# Allegro board ex2_rlc.brd
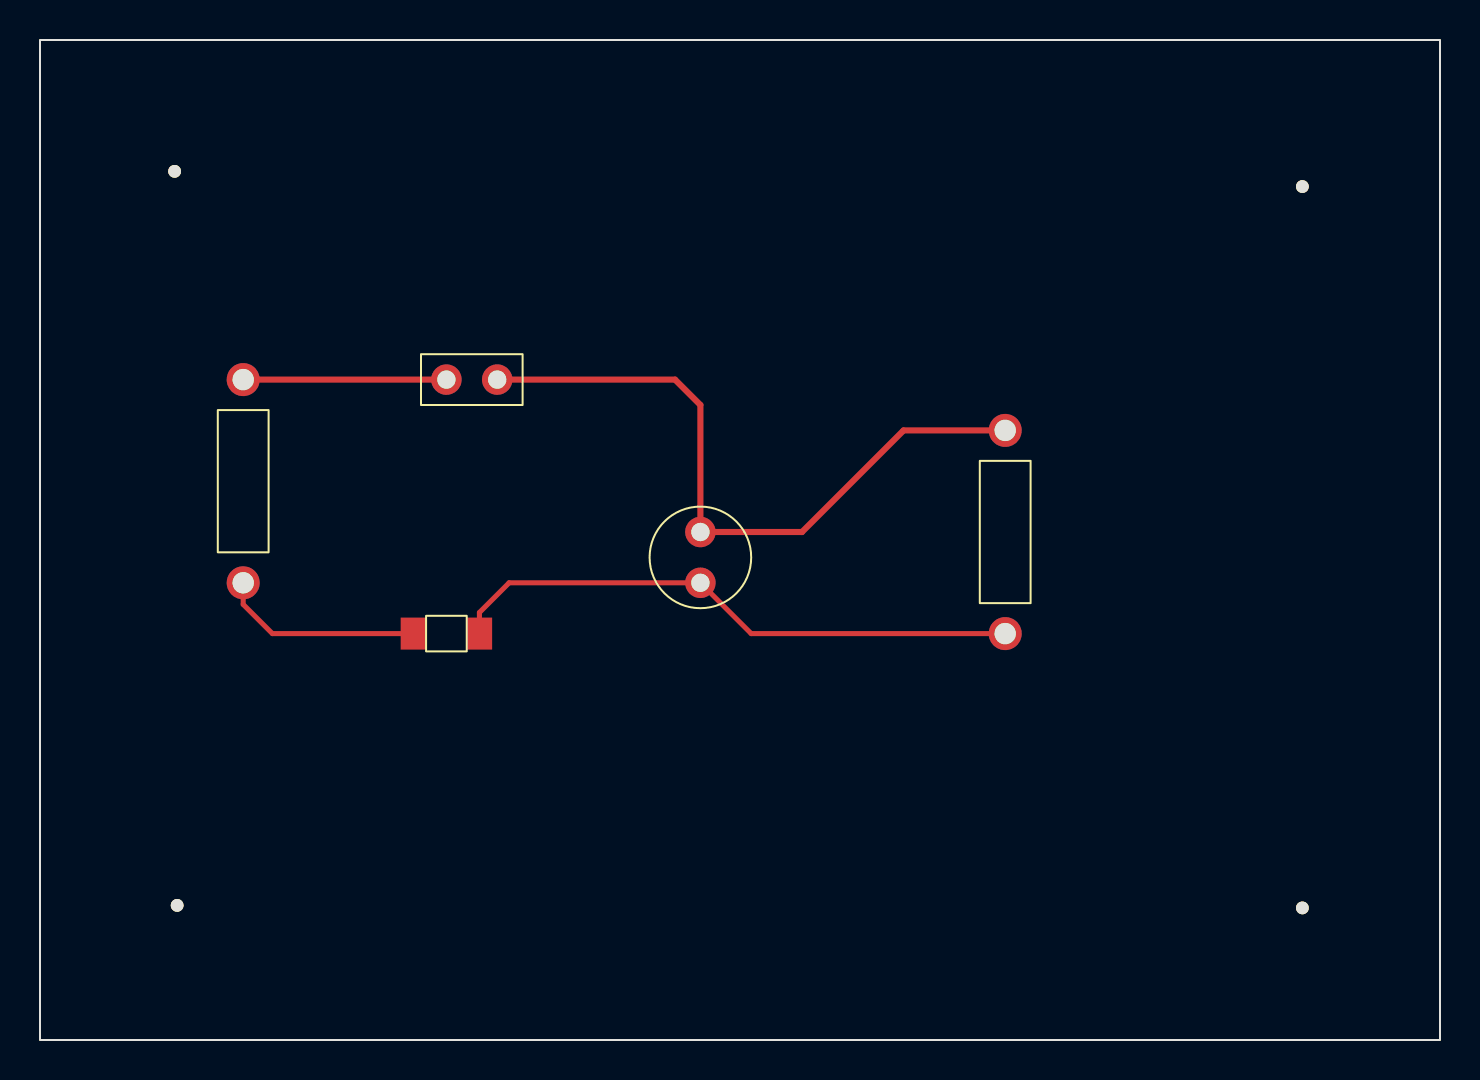
[diagram p0: board, top side]
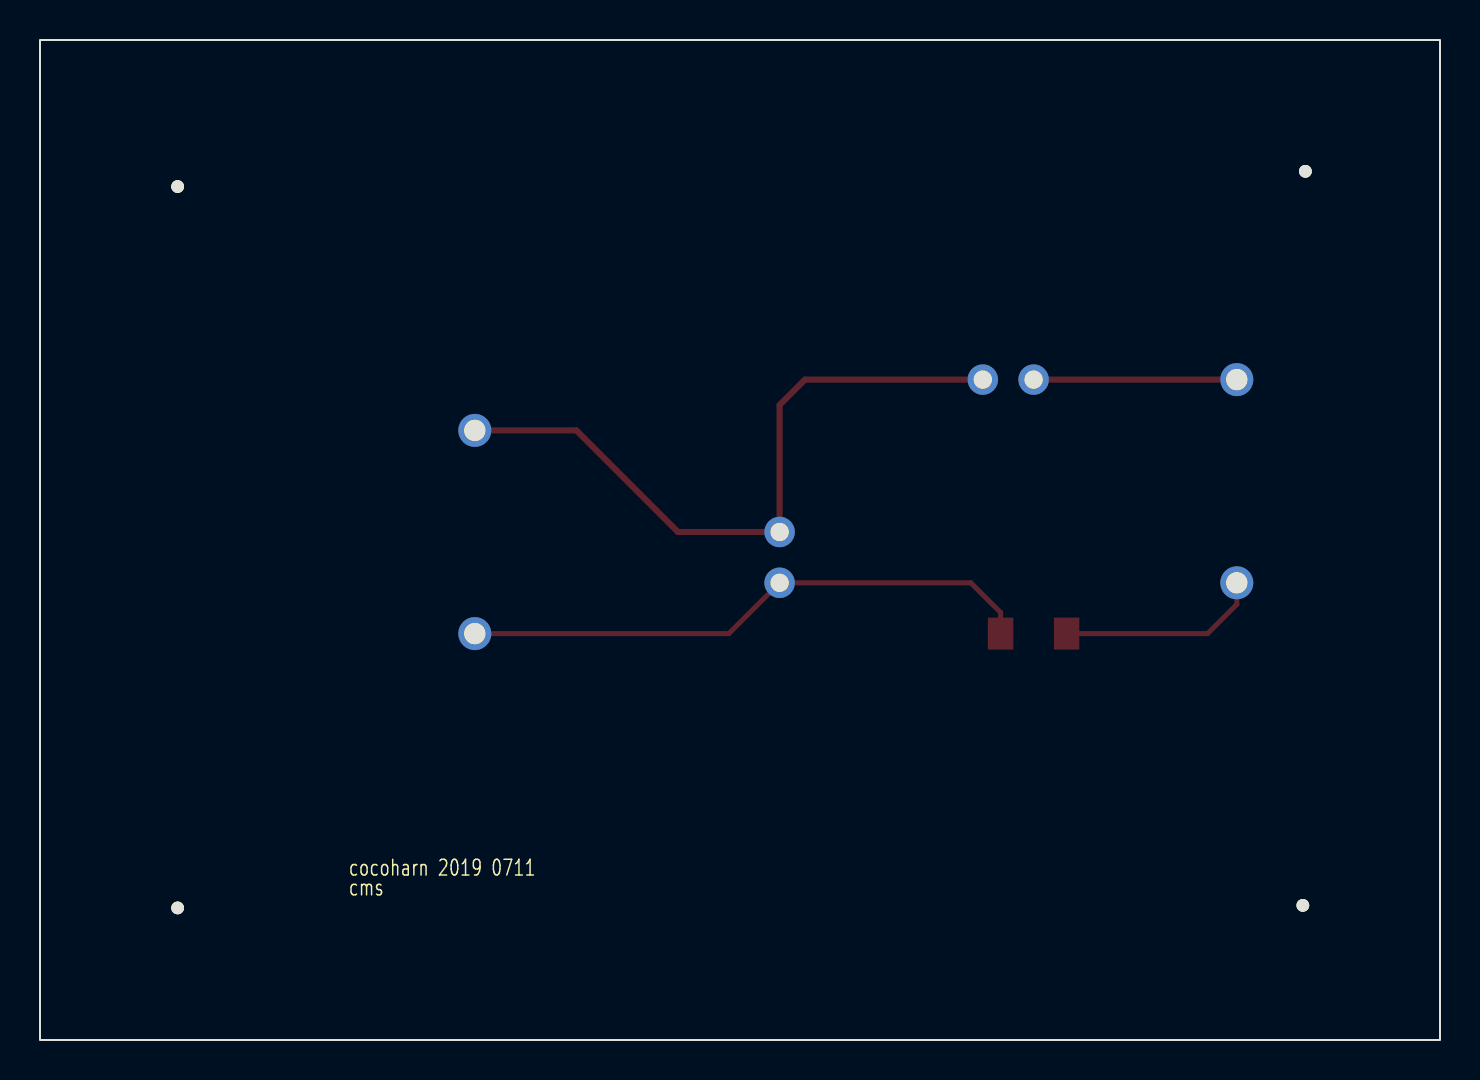
[diagram p1: board, bottom side, seen from below]

Outline 70 x 50 mm; copper layers: TOP, BOTTOM. Coordinates in mm from the lower left corner of the outline.
Outline path: rectangle 0,0 70,50

## Design rules (mm)
net group BASENETS: nets KKK N00135
net group POWERNETS: nets GND VCC

## Placement (name value [footprint] x y rotation side)
C1  1u  [CAP196]  33.02 22.86 0 top
J1  CON2  [JUMPER2]  20.32 33.02 0 top
L1  100n  [SMDRES]  20.32 20.32 0 top
NOREF  -  [unnamed]  6.86 6.73 0 top
NOREF#2  -  [unnamed]  6.73 43.43 0 top
NOREF#3  -  [unnamed]  63.12 6.6 0 top
NOREF#4  -  [unnamed]  63.12 42.67 0 top
R1  330  [RES400]  10.16 33.02 180 top
R2  330  [RES400]  48.26 20.32 0 top

## Library data of the parts
C1 = CAP NP: Tolerance: ***; User Part Number: ***
J1 = CON2: User Part Number: ***
L1 = INDUCTOR: Tolerance: ***; User Part Number: ***
R1 R2 = R: Tolerance: ***; User Part Number: ***

## Footprints (pads in the part's own frame, mm; a bottom-side part is the same pattern mirrored in y, then rotated)
CAP196
  round 1.524 hole 0.914: 1(0,0) 2(0,2.54)
JUMPER2
  round 1.524 hole 0.914: 1(0,0) 2(2.54,0)
RES400
  round 1.651 hole 1.067: 1(0,0) 2(0,10.16)
SMDRES
  rect 1.27x1.6 smd: 1(-1.651,0) 2(1.651,0)
unnamed
  round 0.635 hole 3.175 unplated: (0,0)

## Nets
GND: C1.2 J1.2 R2.2
VCC: J1.1 R1.1
KKK: L1.1 R1.2
N00135: C1.1 L1.2 R2.1

## Routing (per net, layer and track width the routed paths; a pad name or vN(x,y) marks a point on that pad's centre or on a via; arc(x,y) is an arc through that point)
GND: length 34.4
  TOP w0.308: J1.2 31.75,33.02 33.02,31.75 C1.2 38.1,25.4 43.18,30.48 R2.2
VCC: length 10.2
  TOP w0.308: R1.1 J1.1
KKK: length 10.2
  TOP w0.254: R1.2 10.16,21.78 11.62,20.32 L1.1
N00135: length 29
  TOP w0.254: R2.1 35.56,20.32 C1.1 23.46,22.86 21.97,21.37 L1.2

## Text on the board
Ref Des/Silkscreen Bottom: cocoharn 2019 0711 | cms
TOLERANCE_TOP: FIGURE | FINISHED_SIZE | 0.914 | 1.067 | 3.175 | DRILL CHART: TOP to BOTTOM | ALL UNITS ARE IN MILLIMETERS | PLATED | NON-PLATED | QTY | 4
